# Altium PCB CLStepper.PcbDoc
Units mm, origin at the board's own origin, x right, y up, seen from the top; angles counter-clockwise.
Board outline 40 x 40 mm, 2 copper layers (Top Layer, Bottom Layer); 39 components, 42 nets, 188 pads, 276 vias.
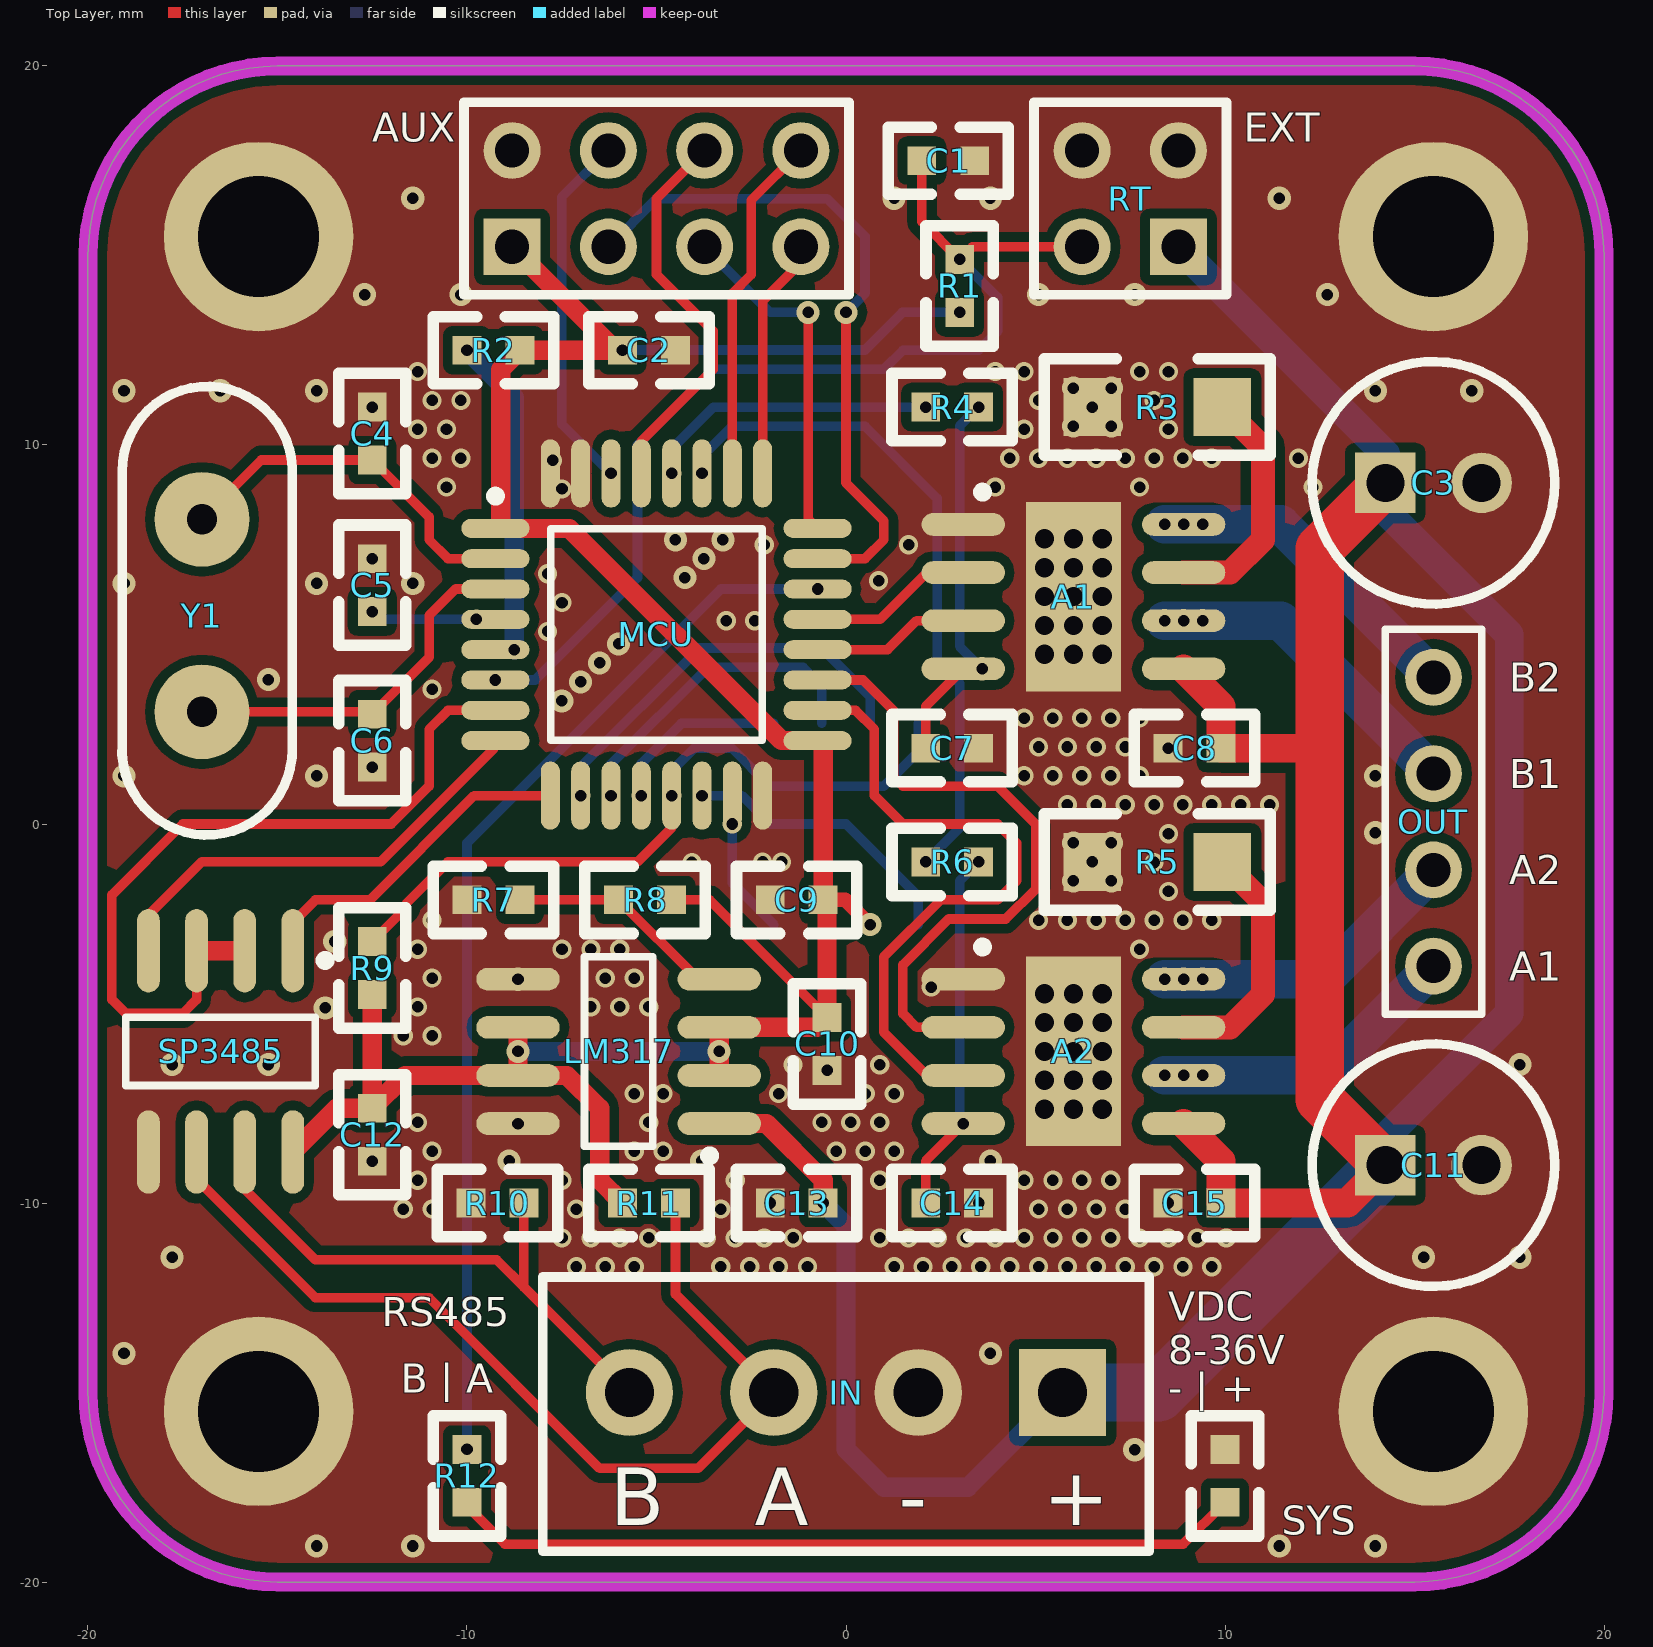
[diagram p0: Top Layer view]
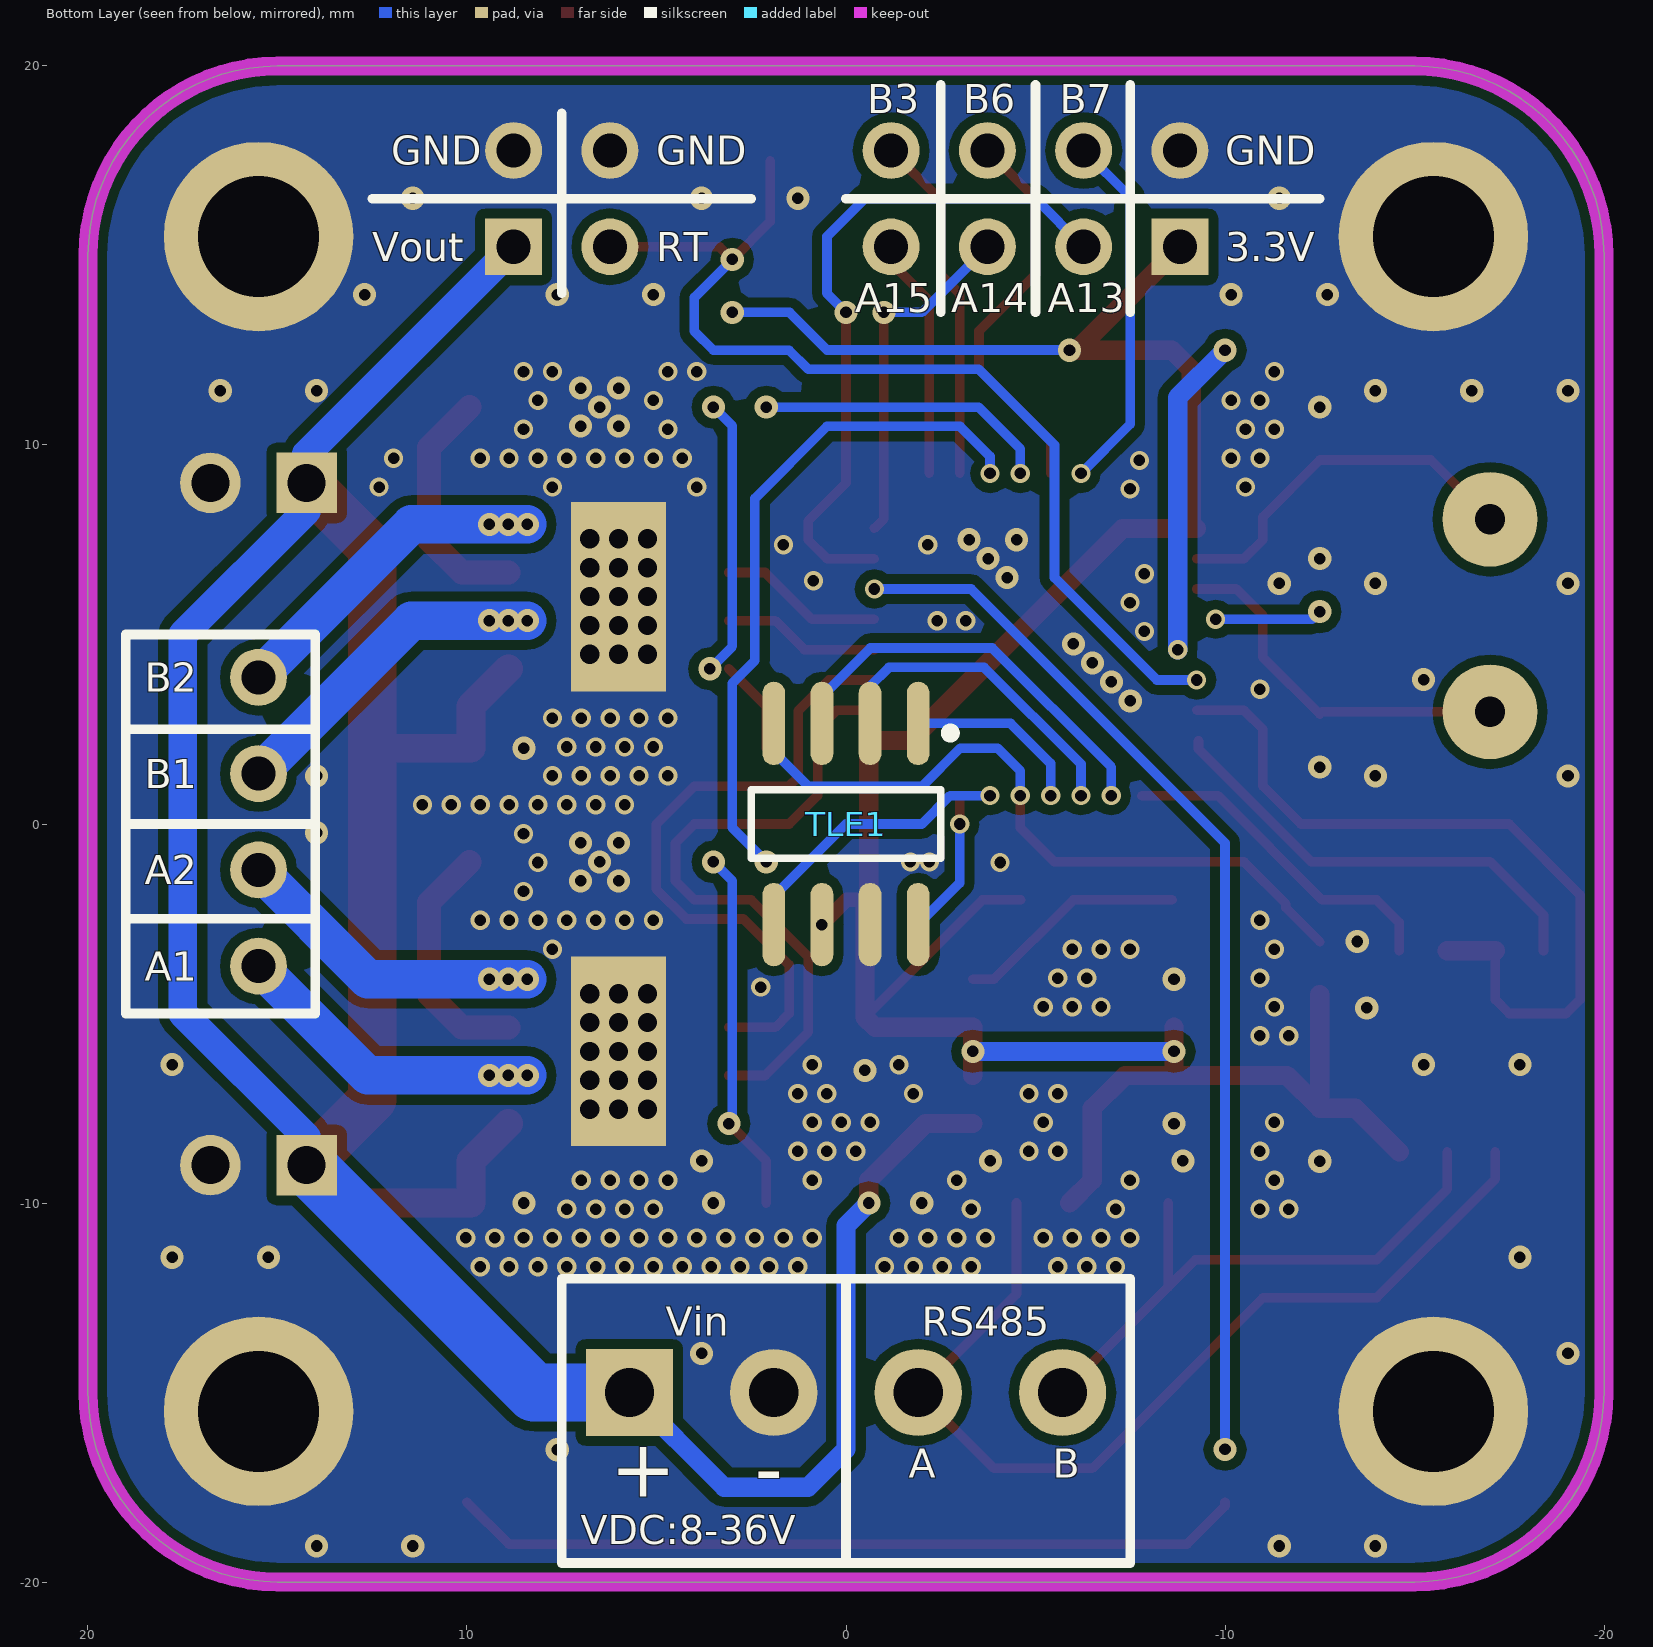
[diagram p1: Bottom Layer view, seen from below]

## Layer stack, top to bottom
Top Solder: solder mask 0.0102, Solder Resist, Dk 3.5
Top Layer: signal copper 0.0356
Dielectric 1: dielectric 0.32, FR-4, Dk 4.8
Bottom Layer: signal copper 0.0356
Bottom Solder: solder mask 0.0102, Solder Resist, Dk 3.5

## Board outline
-20,-15 ccw(c-15,-15) -15,-20 15,-20 ccw(c15,-15) 20,-15 20,15 ccw(c15,15) 15,20 -15,20 ccw(c-15,15) -20,15

## Design rules (kind name [scope] priority, off if disabled: settings)
Clearance [All] p1: gap=0.254 ignorepadtopadclearanceinfootprint=FALSE except(0: Arc-Hole Track-Hole SMDPad-Hole THPad-Hole Via-Hole Fill-Hole Poly-Hole Region-Hole Text-Hole)
PlaneConnect [All] p1: planeconnectstyle=Direct reliefexpansion=0.508 reliefentries=4 reliefconductorwidth=0.254 reliefairgap=0.254
PolygonConnect [All] p1: connectstyle=Direct reliefconductorwidth=0.254 reliefentries=4 polygonreliefangle="90 Angle" airgapwidth=0.254
RoutingVias [All] p1: holewidth=0.711 width=1.27 viastyle="Through Hole" minholewidth=0.305 minwidth=0.508 maxholewidth=0.711 maxwidth=1.27
SolderMaskExpansion [All] p1: expansion=0.102
Width [All] p1: maxlimit=2.54 minlimit=0.254 preferedwidth=0.254 minimp=50.000000 maximp=50.000000 favimp=50.000000
29 further rules are at their usual default settings.

## Components (designator, comment, footprint, x,y, rotation, side; value= is the part's Value field where it differs from the comment)
A1 "A4950" SOIC-8P 6,6 r0 top (schematic designator A2)
A2 "A4950" SOIC-8P 6,-6 r0 top (schematic designator A1)
AUX "Header 4X2A" HDR2X4 -5,16.5 r0 top
C1 "Cap" 0603 2,17.5 r0 top value=0.1uf (schematic designator C89)
C2 "Cap" 0603 -5.897,12.5 r0 top value=0.1uf (schematic designator C14)
C3 "Cap Pol1" RB.1/.2-F 15.5,9 r180 top value=100uf (schematic designator C6)
C4 "Cap" 0603 -12.5,9.603 r90 top value=20p (schematic designator C5)
C5 "Cap" 0603 -12.5,5.603 r90 top value=0.1uf (schematic designator C9)
C6 "Cap" 0603 -12.5,2.897 r270 top value=20p (schematic designator C10)
C7 "Cap" 0603 3.5,2 r180 top value=0.1uf
C8 "Cap" 0603 8.5,2 r0 top value=0.22uf (schematic designator C4)
C9 "Cap" 0603 -2,-2 r0 top value=0.1uf (schematic designator C13)
C10 "Cap" 0603 -0.5,-6.5 r90 top value=1uf (schematic designator C11)
C11 "Cap Pol1" RB.1/.2-F 15.5,-9 r180 top value=100uf (schematic designator C2)
C12 "Cap" 0603 -12.5,-8.897 r90 top value=104 (schematic designator C1)
C13 "Cap" 0603 -2,-10 r0 top value=0.1uf (schematic designator C12)
C14 "Cap" 0603 3.5,-10 r180 top value=0.1uf (schematic designator C3)
C15 "Cap" 0603 8.5,-10 r0 top value=0.22uf (schematic designator C8)
IN "Header 4" KF2EDG3.81-4P 0,-15 r0 top
LM317 "LM317LDR2G" SOIC-8 -6,-6 r180 top
MCU "STM32F030K6Tx" LQFP-32 -5,5 r0 top
OUT "Header 4" HDR4X1-2.54-R 15.5,-3.75 r90 top
R1 "Res1" 0603 3,13.5 r90 top value=10K (schematic designator R89)
R2 "Res1" 0603 -10,12.5 r0 top value=0 (schematic designator R89)
R3 "Res1" 1206 9.929,11 r180 top value=0.1R (schematic designator R5)
R4 "Res1" 0603 3.5,11 r180 top value=10K (schematic designator R6)
R5 "Res1" 1206 9.929,-1 r180 top value=0.1R (schematic designator R1)
R6 "Res1" 0603 3.5,-1 r180 top value=10K (schematic designator R3)
R7 "Res1" 0603 -8.603,-2 r180 top value=390 (schematic designator R8)
R8 "Res1" 0603 -4.603,-2 r180 top value=240 (schematic designator R7)
R9 "Res1" 0603 -12.5,-4.5 r90 top value=1k
R10 "Res1" 0603 -9.897,-10 r0 top value=20K (schematic designator R4)
R11 "Res1" 0603 -5.897,-10 r0 top value=20K (schematic designator R2)
R12 "Res1" 0603 -10,-16.5 r270 top value=1K (schematic designator R88)
RT "Header 2X2" HDR2X2 7.5,16.5 r90 top
SP3485 "SP3485" SOIC-8 -16.5,-6 r270 top
SYS "LED0" 0603 10,-17.897 r90 top (schematic designator D1)
TLE1 "TLE5012B" SOIC-8 0,0 r270 bottom (schematic designator TLE5012B)
Y1 "8M" XTAL-1 -17.5,5.5 r90 top

## Footprints (in the part's own frame and the unit in brackets; to place one, negate y for a bottom-side part, rotate by r counter-clockwise, add the part's x,y. Pads: shape width x height; smd on the part's side, far side on the other; paste and mask are expansions set on the pad)
0603 [mil]
  rect 30x30 smd: 1(0,0) 2(55,0)
  silkscreen extent -35,-35 90,35
1206 [mil]
  rect 60x60 smd: 1(0,0) 2(135,0)
  silkscreen extent -50,-50 185,50
HDR2X2 [mm]
  rect 1.5x1.5 hole 0.9: 1(-1.27,-1.27)
  round 1.5 hole 0.9: 2(1.27,-1.27) 3(-1.27,1.27) 4(1.27,1.27)
  silkscreen extent -2.54,-2.54 2.54,2.54
HDR2X4 [mm]
  rect 1.5x1.5 hole 0.9: 1(-3.81,-1.27)
  round 1.5 hole 0.9: 2(-1.27,-1.27) 3(1.27,-1.27) 4(3.81,-1.27) 5(-3.81,1.27) 6(-1.27,1.27) 7(1.27,1.27) 8(3.81,1.27)
  silkscreen extent -5.08,-2.54 5.08,2.54
HDR4X1-2.54-R [mm] "2.54单排针排座"
  round 1.5 hole 0.9: 1(0,0) 2(2.54,0) 3(5.08,0) 4(7.62,0)
  silkscreen extent -1.27,-1.27 8.89,1.27
KF2EDG3.81-4P [mm]
  round 2.3 hole 1.3: 1(-5.715,0) 2(-1.905,0) 3(1.905,0)
  rect 2.3x2.3 hole 1.3: 4(5.715,0)
  silkscreen extent -8,-4.19 8,3.05
LQFP-32 [mm] "LQFP"
  oval 1.8x0.5 smd: 1(-4.25,2.8) 2(-4.25,2) 3(-4.25,1.2) 4(-4.25,0.4) 5(-4.25,-0.4) 6(-4.25,-1.2) 7(-4.25,-2) 8(-4.25,-2.8) 17(4.25,-2.8) 18(4.25,-2) 19(4.25,-1.2) 20(4.25,-0.4) 21(4.25,0.4) 22(4.25,1.2) 23(4.25,2) 24(4.25,2.8)
  oval 0.5x1.8 smd: 9(-2.8,-4.25) 10(-2,-4.25) 11(-1.2,-4.25) 12(-0.4,-4.25) 13(0.4,-4.25) 14(1.2,-4.25) 15(2,-4.25) 16(2.8,-4.25) 25(2.8,4.25) 26(2,4.25) 27(1.2,4.25) 28(0.4,4.25) 29(-0.4,4.25) 30(-1.2,4.25) 31(-2,4.25) 32(-2.8,4.25)
  silkscreen extent -4.37,-2.79 2.79,3.77, body extent -3.5,-3.5 3.5,3.5, height 1.6
RB.1/.2-F [mm]
  rect 1.6x1.6 hole 1: 1(1.27,0)
  round 1.6 hole 1: 2(-1.27,0)
  silkscreen extent -3.2,-3.2 3.2,3.2
SOIC-8 [mm]
  oval 2.2x0.6 smd: 1(-2.654,1.905) 2(-2.654,0.635) 3(-2.654,-0.635) 4(-2.654,-1.905) 5(2.654,-1.905) 6(2.654,-0.635) 7(2.654,0.635) 8(2.654,1.905)
  silkscreen extent -2.53,-2.5 0.9,2.88, body extent -3,-2.45 3,2.45, height 1.7
SOIC-8P [mil]
  oval 86.61x23.62 smd: 1(-114.49,75) 2(-114.49,25) 3(-114.49,-25) 4(-114.49,-75) 5(114.49,-75) 6(114.49,-25) 7(114.49,25) 8(114.49,75)
  rect 30x30 hole 20: 9(-30,-60) 9(-30,-30) 9(-30,0) 9(-30,30) 9(-30,60) 9(0,-60) 9(0,-30) 9(0,0) 9(0,30) 9(0,60) 9(30,-60) 9(30,-30) 9(30,0) 9(30,30) 9(30,60)
  rect 98.43x196.85 smd: 9(0,0)
  rect 98.43x196.85 smd far side: 9(0,0)
  silkscreen extent -99,104 -90,113
XTAL-1 [mm]
  round 2.5 hole 0.8: 1(-2.54,-0.508) 2(2.54,-0.508)
  silkscreen extent -5.79,-2.89 6.04,1.6

## Part data
AUX: "Header, 4-Pin, Dual row", LatestRevisionDate=17-Jul-2002, LatestRevisionNote="Re-released for DXP Platform.", Publisher="Altium Limited"
C1 C2 C4 C5 C6 C7 C8 C9 C10 C12 C13 C14 C15: "Capacitor", LatestRevisionDate=17-Jul-2002, LatestRevisionNote="Re-released for DXP Platform.", PackageDescription="Radial Cap, Thru-Hole; 2 Leads; 0.3 in Pin Spacing", PackageReference=RAD-0.3, Published=8-Jun-2000, Publisher="Altium Limited"
C3 C11: "Polarized Capacitor (Radial)", LatestRevisionDate=17-Jul-2002, LatestRevisionNote="Re-released for DXP Platform.", PackageDescription="Polarized Capacitor (Radial); 2 Leads", PackageReference=RB7.6-15, Published=8-Jun-2000, Publisher="Altium Limited"
IN OUT: "Header, 4-Pin", LatestRevisionDate=17-Jul-2002, LatestRevisionNote="Re-released for DXP Platform.", Publisher="Altium Limited"
R1 R2 R3 R4 R5 R6 R7 R8 R9 R10 R11 R12: "Resistor", LatestRevisionDate=17-Jul-2002, LatestRevisionNote="Re-released for DXP Platform.", PackageDescription="Axial Device, Thru-Hole; 2 Leads; 0.3 in Pin Spacing", PackageReference=AXIAL-0.3, Published=8-Jun-2000, Publisher="Altium Limited"
RT: "Header, 2-Pin, Dual row", LatestRevisionDate=17-Jul-2002, LatestRevisionNote="Re-released for DXP Platform.", Publisher="Altium Limited"
SYS: "Typical INFRARED GaAs LED", LatestRevisionDate=08-Jul-2005, LatestRevisionNote="Mech Layer 1 removed.", PackageDescription="LED; 2 Leads", PackageReference=LED-0, Published=8-Jun-2000, Publisher="Altium Limited"
Y1: library part XTAL, "Crystal Oscillator", LatestRevisionDate=17-Jul-2002, LatestRevisionNote="Re-released for DXP Platform.", PackageDescription="Crystal, Thru-Hole; 2 Leads; Body 3.1 x 8.2 mm (Dia.xH)", PackageReference=R38, Published=8-Jun-2000, Publisher="Altium Limited"

## Free pads (board coordinates)
  round 5 hole 3.2: 0(-15.5,-15.5) 0(-15.5,15.5) 0(15.5,-15.5) 0(15.5,15.5)

## Via types
v1: diameter 0.508, hole 0.305, Top Layer to Bottom Layer, tented both sides, 177 vias
v2: diameter 0.61, hole 0.305, Top Layer to Bottom Layer, tented both sides, 99 vias

## Nets (pads, with @x,y where several pads share a name; then routed paths per layer and width w, separated by ;. In a path a pad name is that pad's centre, name@x,y a point inside that pad or via, vN(x,y) a via of type N, cw(c..) or ccw(c..) an arc to the next point about the centre after c; other vN are vias at no path point)
+3.3: AUX.1 C2.1 C9.2 C10.2 C12.2 LM317.2 LM317.3 LM317.6 LM317.7 MCU.1 MCU.17 R1.1 R2.2 R8.1 R9.1 R11.1 SP3485.8 TLE1.6 | length 71.8
  Top Layer w0.254: R8.1 -3.603,-2 C10.2
  Top Layer w0.381: C9.2 -0.019,-2 v2(0.635,-2.654)
  Top Layer w0.508: SP3485.8 -13.441,-7.5 C12.2 ; R9.1 C12.2 ; MCU.1 MCU.1@-9.111,7.8 ; AUX.1 C2.1@-6.08,12.5 ; LM317.6 v2(-8.654,-6) LM317.7 ; R11.1 -6.5,-9.397 -6.5,-7.5 -7.365,-6.635 LM317.7 ; v2(-5.897,12.5) C2.1@-6.08,12.5 ; LM317.2 v2(-3.346,-6) LM317.3 -0.762,-5.365 C10.2 -0.5,-2.103 C9.2 -0.603,2.053 MCU.17 -1.7,2.2 -7.3,7.8 MCU.1@-9.111,7.8 ; C12.2 -11.635,-6.635 LM317.7 ; MCU.1@-9.111,7.8 -9.111,11.992 R2.2 C2.1@-6.08,12.5
  Bottom Layer w0.254: v2(-5.897,12.5) -5.889,12.508 0.5,12.508 1.492,13.5 v2(3,13.5)
  Bottom Layer w0.508: v2(-8.654,-6) v2(-3.346,-6)
AD0: C1.1 MCU.6 R1.2 RT.3 | length 27.8
  Top Layer w0.254: C1.1 2,15.897 v2(3,14.897) 3.333,15.23 RT.3
  Bottom Layer w0.254: v1(-9.25,3.8) -8.2,3.8 -5.5,6.5 -5.5,10 -3.5,12 1,12 1.5,12.5 3.5,12.5 4,13 4,13.897 v2(3,14.897)
GND: A1.1 A1.9 A2.1 A2.9 AUX.5 C1.2 C2.2 C3.2 C4.2 C5.2 C6.2 C7.1 C8.1 C9.1 C10.1 C11.2 C12.1 C13.1 C14.1 C15.1 IN.3 LM317.5 LM317.8 MCU.16 MCU.31 MCU.32 pad.0 R3.2 R5.2 R7.2 R10.1 RT.2 RT.4 SP3485.5 SYS.2 TLE1.7
  other v1: -7.112,-11.684 -6.35,-11.684 -5.588,-11.684 -3.302,-11.684 -2.54,-11.684 -1.778,-11.684 -1.016,-11.684 1.27,-11.684 2.032,-11.684 2.794,-11.684 3.556,-11.684 4.318,-11.684 5.08,-11.684 5.842,-11.684 6.604,-11.684 7.366,-11.684 8.128,-11.684 8.89,-11.684 9.652,-11.684 -7.493,-10.922 -6.731,-10.922 -5.969,-10.922 -5.207,-10.922 -3.683,-10.922 -2.921,-10.922 -2.159,-10.922 -1.397,-10.922 0.889,-10.922 1.651,-10.922 2.413,-10.922 3.175,-10.922 3.937,-10.922 4.699,-10.922 5.461,-10.922 6.223,-10.922 6.985,-10.922 7.747,-10.922 8.509,-10.922 9.271,-10.922 10.033,-10.922 -11.684,-10.16 -10.922,-10.16 -7.112,-10.16 -3.302,-10.16 5.08,-10.16 5.842,-10.16 6.604,-10.16 7.366,-10.16 -11.303,-9.398 -7.493,-9.398 -2.921,-9.398 0.889,-9.398 4.699,-9.398 5.461,-9.398 6.223,-9.398 6.985,-9.398 -10.922,-8.636 -5.588,-8.636 -4.826,-8.636 -0.254,-8.636 0.508,-8.636 1.27,-8.636 -11.303,-7.874 -5.207,-7.874 -0.635,-7.874 0.127,-7.874 0.889,-7.874 -5.588,-7.112 -4.826,-7.112 -1.778,-7.112 0.508,-7.112 1.27,-7.112 -1.397,-6.35 0.889,-6.35 -11.684,-5.588 -10.922,-5.588 -11.303,-4.826 -6.731,-4.826 -5.969,-4.826 -5.207,-4.826 2.247,-4.302 -10.922,-4.064 -6.35,-4.064 -5.588,-4.064 -11.303,-3.302 -7.493,-3.302 -6.731,-3.302 -5.969,-3.302 7.747,-3.302 -10.922,-2.54 5.08,-2.54 5.842,-2.54 6.604,-2.54 7.366,-2.54 8.128,-2.54 8.89,-2.54 9.652,-2.54 8.509,-1.778 -4.064,-1.016 8.128,-1.016 -2.2,-1 -1.7,-1 8.509,-0.254 5.842,0.508 6.604,0.508 7.366,0.508 8.128,0.508 8.89,0.508 9.652,0.508 10.414,0.508 11.176,0.508 4.699,1.27 5.461,1.27 6.223,1.27 6.985,1.27 7.747,1.27 5.08,2.032 5.842,2.032 6.604,2.032 7.366,2.032 4.699,2.794 5.461,2.794 6.223,2.794 6.985,2.794 7.747,2.794 -10.922,3.556 -7.874,5.08 -3.159,5.366 -2.409,5.366 -7.493,5.842 0.859,6.416 -7.874,6.604 -2.159,7.366 1.651,7.366 -7.493,8.842 -10.541,8.89 3.937,8.89 7.747,8.89 12.319,8.89 -7.743,9.592 -10.922,9.652 -10.16,9.652 4.318,9.652 5.08,9.652 5.842,9.652 6.604,9.652 7.366,9.652 8.128,9.652 8.89,9.652 9.652,9.652 11.938,9.652 -11.303,10.414 -10.541,10.414 4.699,10.414 8.509,10.414 -10.922,11.176 -10.16,11.176 5.08,11.176 8.128,11.176 -11.303,11.938 3.937,11.938 4.699,11.938 7.747,11.938 8.509,11.938
  other v2: -13.97,-19.05 -11.43,-19.05 11.43,-19.05 13.97,-19.05 7.62,-16.51 -19.05,-13.97 3.81,-13.97 -17.78,-11.43 15.24,-11.43 17.78,-11.43 -2,-10 3.5,-10 8.5,-10 -12.5,-8.897 -8.89,-8.89 -3.81,-8.89 3.81,-8.89 -8.654,-7.905 -0.5,-6.5 -17.78,-6.35 -15.24,-6.35 17.78,-6.35 -13.74,-4.85 -8.654,-4.095 -13.49,-3.1 6,-1.5 7,-1.5 6.5,-1 6,-0.5 7,-0.5 13.97,-0.23 -19.05,1.27 -13.97,1.27 13.97,1.27 -12.5,1.5 8.5,2 -7.5,3.25 -7,3.75 -15.24,3.81 -6.5,4.25 -6,4.75 -19.05,6.35 -13.97,6.35 -11.43,6.35 -4.25,6.5 -12.5,7 -3.75,7 -4.5,7.5 -3.25,7.5 6,10.5 7,10.5 -12.5,11 6.5,11 -19.05,11.43 -16.51,11.43 -13.97,11.43 13.97,11.43 16.51,11.43 6,11.5 7,11.5 -12.7,13.97 -10.16,13.97 5.08,13.97 7.62,13.97 12.7,13.97 -11.43,16.51 1.27,16.51 3.81,16.51 11.43,16.51
IFA: MCU.14 TLE1.5 | length 7.6
  Bottom Layer w0.254: v1(-3.8,0.75) -2.75,0.75 -2,0 0,0 1.905,-1.905 TLE1.5
IFB: MCU.15 TLE1.8 | length 3.9
  Top Layer w0.254: v1(-3,0) MCU.15
  Bottom Layer w0.254: v1(-3,0) -3,-1.559 TLE1.8
IFC: MCU.12 TLE1.1 | length 4.8
  Bottom Layer w0.254: v1(-5.4,0.75) -5.4,1.6 -4.346,2.654 TLE1.1
IN1: A2.3 MCU.18 | length 17.6
  Top Layer w0.254: MCU.18 0.25,3 0.75,2.5 0.75,0.75 1.5,0 4,0 4.5,-0.5 4.5,-1.5 4,-2 2.5,-2 0.992,-3.508 0.992,-5.492 2.135,-6.635 A2.3
IN2: A2.2 MCU.19 | length 17.4
  Top Layer w0.254: MCU.19 0.45,3.8 1.258,2.992 1.258,1.242 1.5,1 4,1 5.008,-0.008 5.008,-1.71 4.21,-2.508 2.71,-2.508 1.5,-3.718 1.5,-5 1.865,-5.365 A2.2
IN3: A1.3 MCU.20 | length 4.2
  Top Layer w0.254: MCU.20 1.1,4.6 1.865,5.365 A1.3
IN4: A1.2 MCU.21 | length 4.4
  Top Layer w0.254: MCU.21 0.9,5.4 2.135,6.635 A1.2
NetA1_4: A2.4 C14.2 R6.1 | length 9.7
  Top Layer w0.254: C14.2 2.103,-8.894 v2(3.092,-7.905)
  Bottom Layer w0.254: v2(3.092,-7.905) 3,-7.813 3,-1.5 v2(3.5,-1)
NetA1_7: A2.7 R5.1 | length 6.4
  Top Layer w0.635: A2.7 10.135,-5.365 11,-4.5 11,-2.071 R5.1
NetA2_4: A1.4 C7.2 R4.1 | length 9.9
  Top Layer w0.254: C7.2 2.103,3.106 A1.4
  Bottom Layer w0.254: v2(3.5,11) 3,10.5 3,4.687 v2(3.592,4.095)
NetA2_7: A1.7 R3.1 | length 6.4
  Top Layer w0.635: A1.7 10.135,6.635 11,7.5 11,9.929 R3.1
NetC9_1: C5.1 MCU.4 | length 2.8
  Bottom Layer w0.254: v2(-12.5,5.603) -12.297,5.4 v1(-9.75,5.4)
NetD1_1: R12.2 SYS.1 | length 21
  Top Layer w0.254: R12.2 -10,-18 -9,-19 8.897,-19 SYS.1
NetLM317_4: LM317.4 R7.1 R8.2 | length 6.1
  Top Layer w0.254: R7.1 R8.2 -3.905,-4.095 LM317.4
NetMCU_5: MCU.5 R2.1 | length 8.4
  Bottom Layer w0.508: v2(-10,12.5) -8.75,11.25 v1(-8.75,4.6)
OSC_IN: C4.1 MCU.2 Y1.2 | length 9.8
  Top Layer w0.254: Y1.2 -15.429,9.603 C4.1 -11,8.103 -11,7.5 -10.5,7 MCU.2
OSC_OUT: C6.1 MCU.3 Y1.1 | length 9.8
  Top Layer w0.254: Y1.1 -12.563,2.96 C6.1 -11,4.397 -11,5.5 -10.3,6.2 MCU.3
OUT1: A2.6 OUT.1 | length 8.3
  Bottom Layer w1.016: v2(8.408,-6.635) v2(8.908,-6.635) v2(9.408,-6.635) 12.615,-6.635 OUT.1
OUT2: A2.8 OUT.2 | length 8.3
  Bottom Layer w1.016: v2(8.408,-4.095) v2(8.908,-4.095) v2(9.408,-4.095) 12.615,-4.095 OUT.2
OUT3: A1.6 OUT.3 | length 8.8
  Bottom Layer w1.016: v2(8.408,5.365) v2(8.908,5.365) v2(9.408,5.365) 11.465,5.365 OUT.3
OUT4: A1.8 OUT.4 | length 8.8
  Bottom Layer w1.016: v2(8.408,7.905) v2(8.908,7.905) v2(9.408,7.905) 11.465,7.905 OUT.4
PA15: AUX.4 MCU.25 | length 6.4
  Top Layer w0.254: MCU.25 -2.2,13.8 -1.19,14.81 AUX.4
PB3: AUX.8 MCU.26 | length 9.3
  Top Layer w0.254: MCU.26 -3,14 -2.5,14.5 -2.5,16.46 AUX.8
PB6: AUX.7 MCU.29 | length 10.4
  Top Layer w0.254: MCU.29 -5.4,10.1 -3.508,11.992 -3.508,13.008 -5,14.5 -5,16.5 AUX.7
PB7: AUX.6 MCU.30 | length 9.6
  Bottom Layer w0.254: AUX.6 -7.5,16.54 -7.5,10.55 v1(-6.2,9.25)
RS485_A: IN.2 R11.2 SP3485.6 | length 26
  Top Layer w0.254: SP3485.6 -17.135,-9.365 -14,-12.5 -11,-12.5 -6.5,-17 -3.905,-17 IN.2 -4.5,-12.405 R11.2
RS485_B: IN.1 R10.2 SP3485.7 | length 15.8
  Top Layer w0.254: SP3485.7 -15.865,-9.635 -14,-11.5 -9.215,-11.5 -8.5,-12.215 ; R10.2 -8.5,-12.215 ; IN.1@-5.715,-15.5 IN.1@-5.715,-15.285 ; IN.1 -8.5,-12.215
SPI_MOSI: MCU.13 R9.2 TLE1.4 | length 19
  Top Layer w0.254: R9.2 -11.603,-2.206 -11.603,-2.103 -10.5,-1 -5.5,-1 -4.6,-0.1 v1(-4.6,0.75)
  Bottom Layer w0.254: v1(-4.6,0.75) -4.6,1.4 -4,2 -3.014,2 -2.014,1 1,1 1.905,1.905 TLE1.4
SPI_NSS: MCU.10 TLE1.3 | length 10.9
  Bottom Layer w0.254: v1(-7,0.75) -7,1.5 -3.857,4.643 -0.643,4.643 0.635,3.365 TLE1.3
SPI_SCK: MCU.11 TLE1.2 | length 8.6
  Bottom Layer w0.254: v1(-6.2,0.75) -6.2,1.582 -3.647,4.135 -1.135,4.135 -0.635,3.635 TLE1.2
SWCLK: AUX.3 MCU.24 | length 9.3
  Top Layer w0.254: v2(-1,13.5) -1,8.05 MCU.24
  Bottom Layer w0.254: AUX.3 -2,13.5 v2(-1,13.5)
SWDIO: AUX.2 MCU.23 | length 18.4
  Top Layer w0.254: MCU.23 0.5,7 1,7.5 1,8 0,9 v2(0,13.5)
  Bottom Layer w0.254: AUX.2 -5,16.5 -0.5,16.5 0.5,15.5 0.5,14 v2(0,13.5) v2@-0.102,13.5
SYS: MCU.22 R12.1 | length 28
  Bottom Layer w0.254: v2(-10,-16.5) -10,-0.5 -3.3,6.2 v1(-0.75,6.2)
UART_DE: MCU.7 SP3485.2 SP3485.3 | length 20.9
  Top Layer w0.254: SP3485.3 -17.135,-4.635 -17.5,-5 -19,-5 -19.369,-4.631 -19.369,-1.869 -17.5,0 -12,0 -11,1 -11,2.5 -10.5,3 MCU.7
  Top Layer w0.508: SP3485.3 SP3485.2
UART_RX: MCU.9 SP3485.1 | length 8.9
  Top Layer w0.254: SP3485.1 -14.595,-2.595 -14,-2 -12.563,-2 -9.813,0.75 MCU.9
UART_TX: MCU.8 SP3485.4 | length 12.1
  Top Layer w0.254: SP3485.4 -18.405,-2.405 -17,-1 -12.282,-1 -9.3,1.982 MCU.8@-9.3,2.2
VBB: A1.5 A2.5 C3.1 C8.2 C11.1 C13.2 C15.2 IN.4 LM317.1 RT.1 | length 89.9
  Top Layer w0.508: LM317.1 -2.095,-7.905 -0.603,-9.397 v2(-0.603,-10)
  Top Layer w0.762: A2.5 9.897,-8.894 C15.2 13.23,-10 C11.1 ; A1.5 9.897,3.106 C8.2 12.5,2
  Top Layer w1.27: C11.1 12.5,-7.27 12.5,2 12.5,7.27 C3.1
  Bottom Layer w0.508: v2(-0.603,-10) 0,-10.603 0,-16.5 1,-17.5 3.215,-17.5 IN.4
  Bottom Layer w0.762: RT.1 14.23,9.77 C3.1 14.23,8.27 17.5,5 17.5,-5 14.23,-8.27 C11.1
  Bottom Layer w1.524: IN.4 8.23,-15 C11.1
VREF1: MCU.27 R6.2 | length 18
  Bottom Layer w0.254: v1(-3.8,9.25) -3.8,9.7 -3.008,10.492 0.508,10.492 2.406,8.594 2.406,4.311 3,3.717 3,-0.103 v2(2.103,-1)
VREF2: MCU.28 R4.2 | length 7.8
  Bottom Layer w0.254: v1(-4.6,9.25) -4.6,9.9 -3.5,11 v2(2.103,11)

## Polygon pours and split planes (outlines as drawn)
GND on Bottom Layer "Top Layer-No Net" (solid, remove dead copper, pour order 106): -20,20 20,20 20,-20 -20,-20
GND on Top Layer "Top Layer-No Net" (solid, remove dead copper, pour order 108): -20,20 20,20 20,-20 -20,-20

## Keep-outs
Keep-Out Layer:
  the board outline again, w0.5

## Silkscreen, mask and mechanical layers (free items; w line width, h text height)
Top Overlay:
  text "EXT" at 10.5,18 h0.76
  text "B2" at 17.5,3.489 h0.76
  text "B1" at 17.5,0.949 h0.76
  text "A2" at 17.5,-1.591 h0.76
  text "A1" at 17.5,-4.131 h0.76
  text "RS485" at -12.25,-13.25 h0.76
  text "VDC / 8-36V" at 8.5,-14.25 h0.76
  text "B | A" at -11.75,-15 h0.76
  text "- | +" at 8.5,-15.25 h0.76
  text "B" at -6.223,-18.5 h1.52
  text "A" at -2.413,-18.5 h1.52
  text "-" at 1.397,-18.5 h1.52
  text "+" at 5.207,-18.5 h1.52
Bottom Overlay:
  lines w0.254: -12.5,16.5 0,16.5 ; -7.5,13.5 -7.5,19.5 ; -5,13.5 -5,19.5 ; -2.5,13.5 -2.5,19.5 ; 2.5,16.5 12.5,16.5 ; 7.5,14 7.5,18.75 ; 14,-2.5 19,-2.5 ; 14,0 19,0 ; 14,2.5 19,2.5 ; 0,-19.5 -7.5,-19.5 -7.5,-12 0,-12 ; 0,-19.5 0,-12 ; 0,-19.5 7.5,-19.5 7.5,-12 0,-12 ; 14,-5 14,5 19,5 19,-5 14,-5
  text "B7" at -5.635,18.75 h0.76
  text "B6" at -3.095,18.75 h0.76
  text "B3" at -0.555,18.75 h0.76
  text "GND" at -10,17.389 h0.76
  text "GND" at 5,17.389 h0.76
  text "GND" at 12,17.389 h0.76
  text "3.3V" at -10,14.849 h0.76
  text "RT" at 5,14.849 h0.76
  text "Vout" at 12.5,14.849 h0.76
  text "A13" at -5.318,13.5 h0.76
  text "A14" at -2.778,13.5 h0.76
  text "A15" at -0.238,13.5 h0.76
  text "B2" at 18.5,3.489 h0.76
  text "B1" at 18.5,0.949 h0.76
  text "A2" at 18.5,-1.591 h0.76
  text "A1" at 18.5,-4.131 h0.76
  text "RS485" at -2,-13.5 h0.76
  text "Vin" at 4.75,-13.5 h0.76
  text "B" at -5.461,-17.25 h0.76
  text "A" at -1.651,-17.25 h0.76
  text "-" at 2.413,-17.75 h1.52
  text "+" at 6.223,-17.75 h1.52
  text "VDC:8-36V" at 7,-19 h0.76